# Altium PCB StepperMotorAuxBoard.PcbDoc
Units mil, origin at the board's own origin, x right, y up, seen from the top; angles counter-clockwise.
Board outline 2100 x 1500 mil, 2 copper layers (Top Layer, Bottom Layer); 12 components, 16 nets, 51 pads, 0 vias.
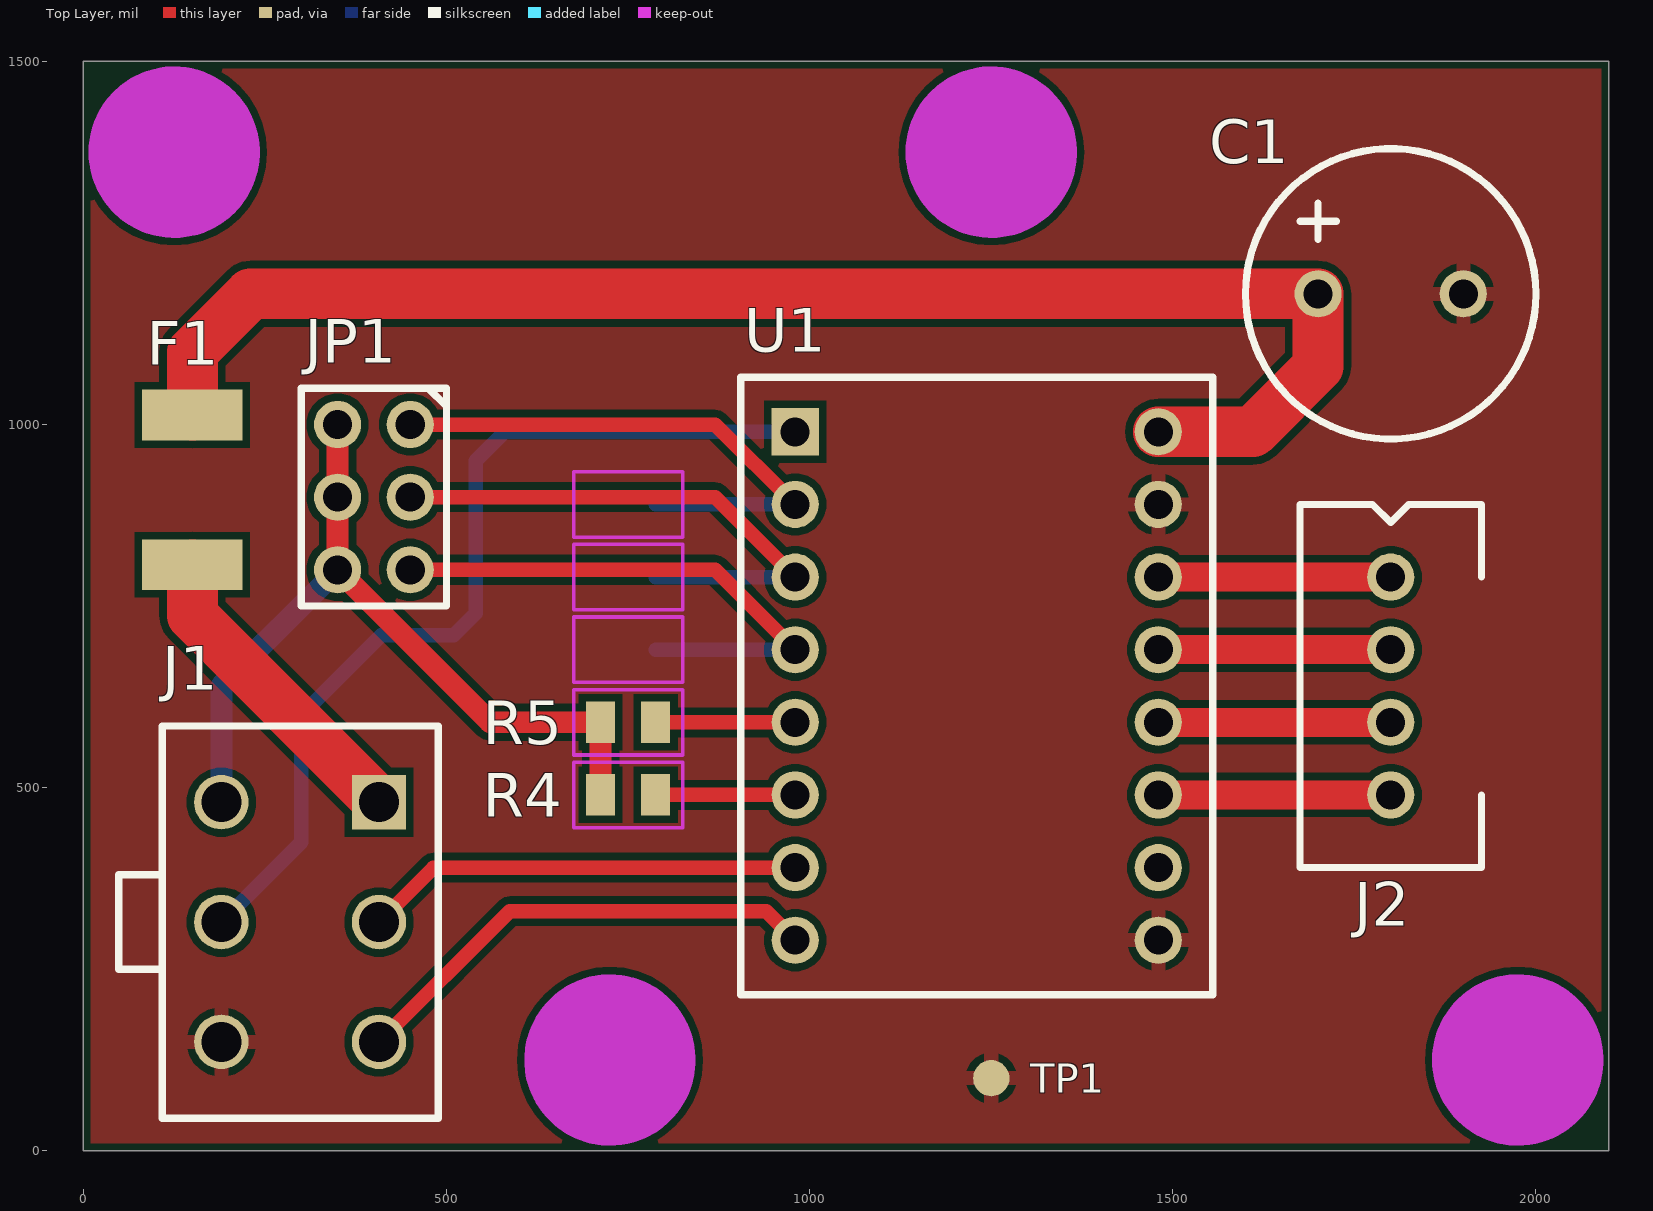
[diagram p0: Top Layer view]
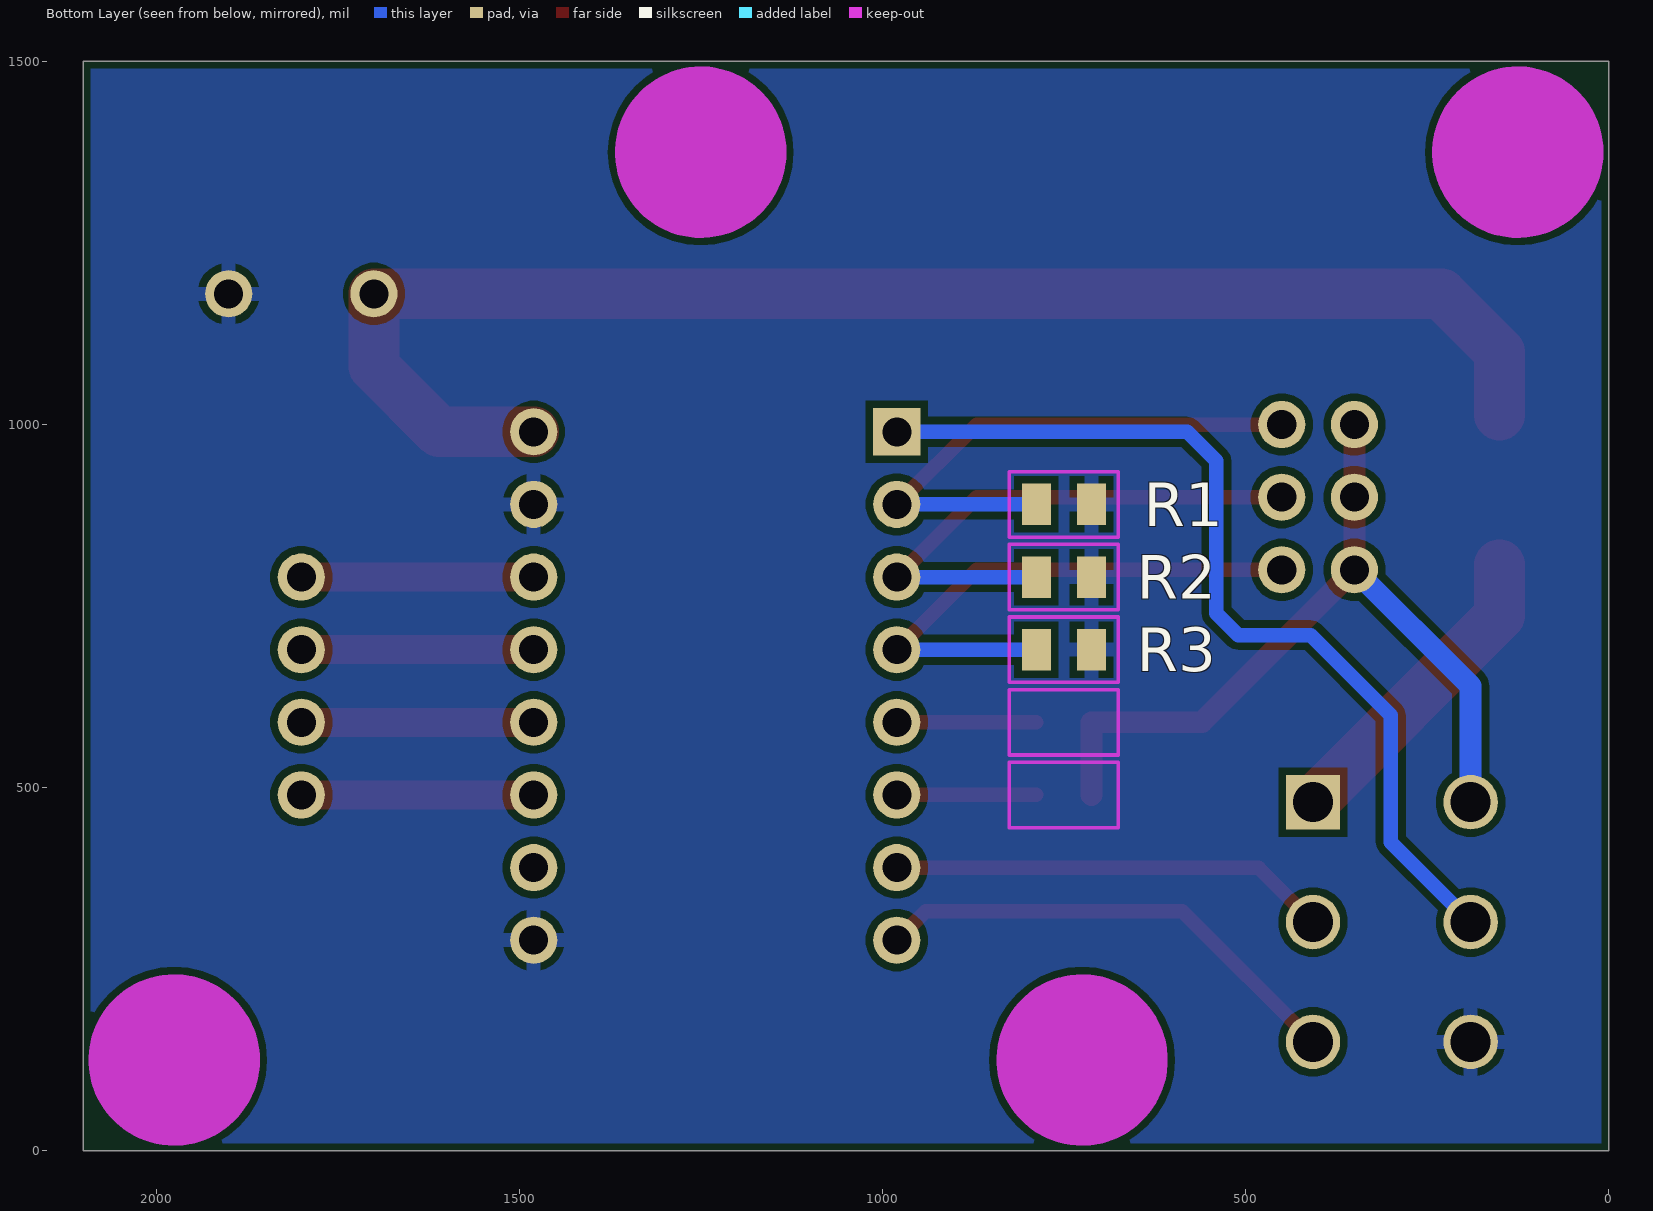
[diagram p1: Bottom Layer view, seen from below]
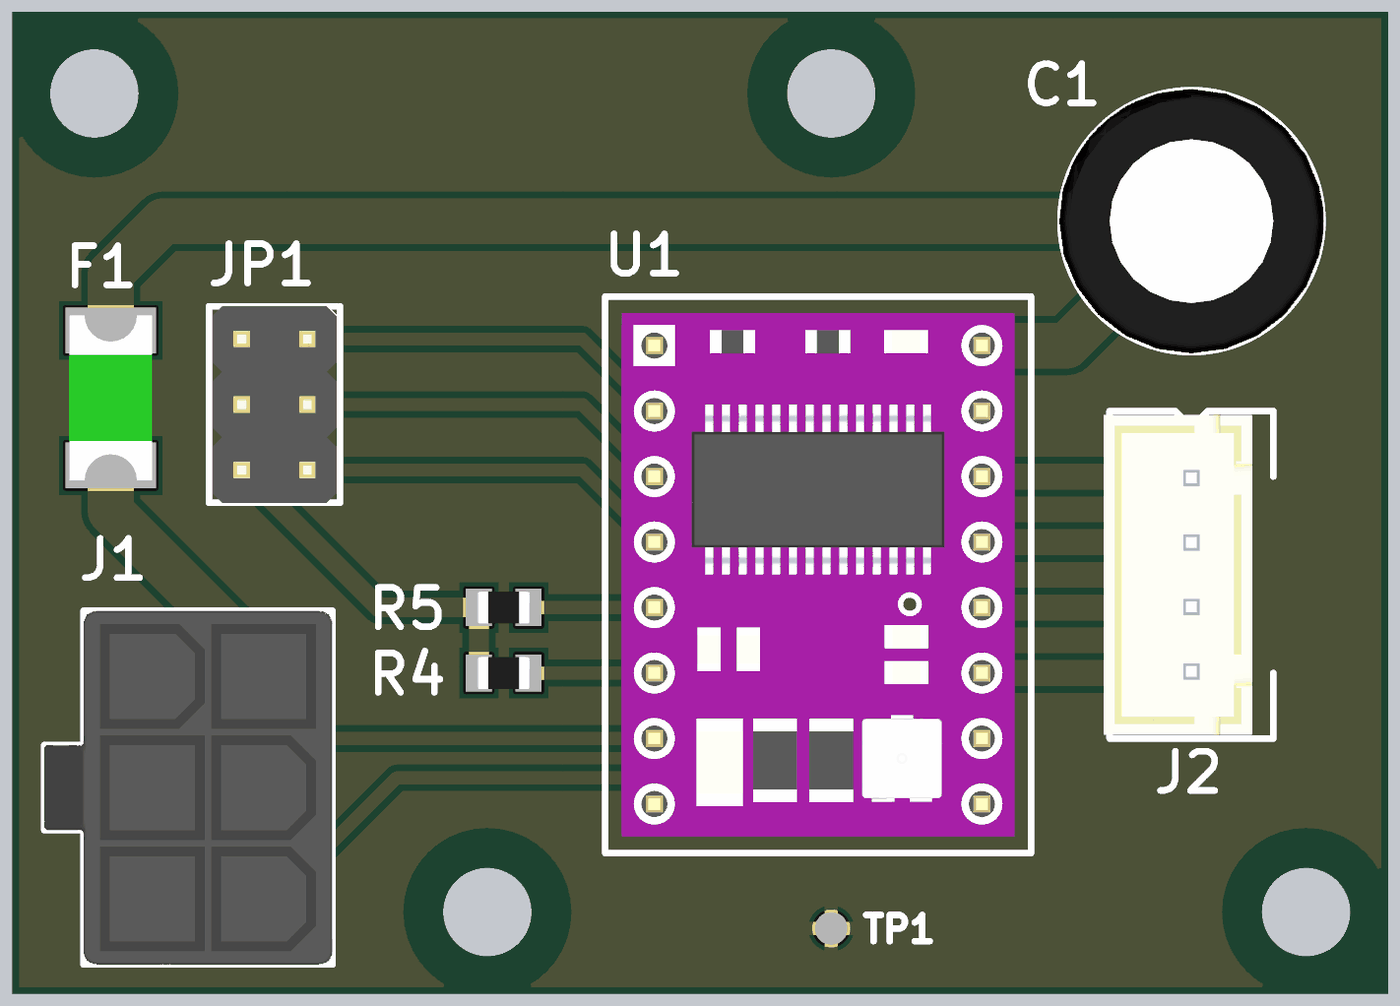
[diagram p2: 3D render of the assembled board from above, using the file's embedded part models]
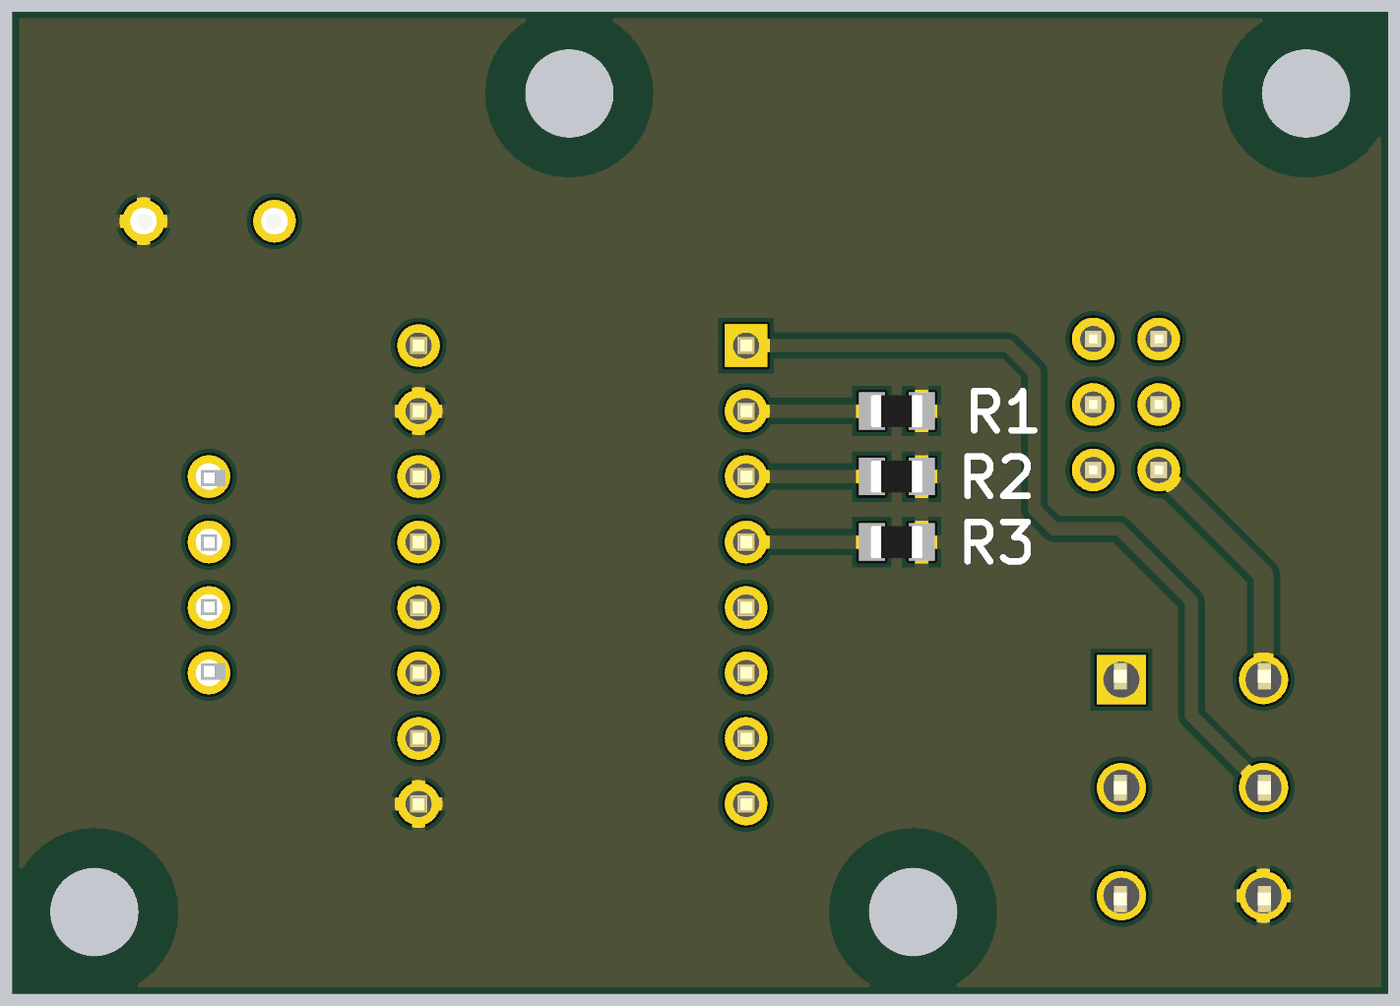
[diagram p3: 3D render of the assembled board from below, using the file's embedded part models]

## Layer stack, top to bottom
Top Solder: solder mask 0.4, Solder Resist, Dk 3.5
Top Layer: signal copper 1.4
Dielectric 1: dielectric 12.6, FR-4, Dk 4.8
Bottom Layer: signal copper 1.4
Bottom Solder: solder mask 0.4, Solder Resist, Dk 3.5

## Board outline
0,0 2100,0 2100,1500 0,1500

## Design rules (kind name [scope] priority, off if disabled: settings)
BoardOutlineClearance [All] p1: gap=10 ignorepadtopadclearanceinfootprint=FALSE except(0: Arc-SplitContinuation Track-SplitContinuation SMDPad-SplitContinuation THPad-SplitContinuation Via-SplitContinuation Fill-SplitContinuation Poly-SplitContinuation Region-SplitContinuation Text-SplitContinuation)
Clearance [All] p1: gap=10 ignorepadtopadclearanceinfootprint=FALSE except(0: Arc-Hole Track-Hole SMDPad-Hole THPad-Hole Via-Hole Fill-Hole Poly-Hole Region-Hole Text-Hole)
HoleSize [All] p1: absolutevalues=TRUE maxlimit=200 minlimit=1 maxpercent=80.000 minpercent=20.000
PolygonConnect [All] p1: connectstyle=Relief reliefconductorwidth=20 reliefentries=4 polygonreliefangle="90 Angle" airgapwidth=10
RoutingVias [All] p1: holewidth=28 width=50 viastyle="Through Hole" minholewidth=28 minwidth=50 maxholewidth=28 maxwidth=50
SolderMaskExpansion [All] p1: expansion=4 istentingtop=FALSE
Width [All] p1: maxlimit=100 minlimit=10 preferedwidth=20 minimp=50.000000 maximp=50.000000 favimp=50.000000
29 further rules are at their usual default settings.

## Components (designator, comment, footprint, x,y, rotation, side; value= is the part's Value field where it differs from the comment)
C1 "100u" Capacitor_UVZ2A101MPD 1800,1180 r0 top
F1 "Fuse" 1812_PTC 150,910 r270 top
J1 "Header_6p_3x2" MOLEX_MiniFitJr_6p 298.5,315 r270 top
J2 "Header_4p" JST-XH_4p 1800,640 r270 top
JP1 "JumperHeader_0.100\"" "JumperHeader_0.100\"" 400,900 r270 top
R1 "100k" 0805 750,890 r0 bottom
R2 "100k" 0805 750,790 r0 bottom
R3 "100k" 0805 750,690 r0 bottom
R4 "1k" 0805 750,490 r180 top
R5 "10k" 0805 750,590 r180 top
TP1 "TestPoint" TestPoint 1230,100 r90 top
U1 "DRV8825" DRV8825 1230,640 r0 top

## Footprints (in the part's own frame and the unit in brackets; to place one, negate y for a bottom-side part, rotate by r counter-clockwise, add the part's x,y. Pads: shape width x height; smd on the part's side, far side on the other; paste and mask are expansions set on the pad)
0805 [mil]
  rect 40x57 smd: 1(-38,0) 2(38,0)
  Keep-Out Layer lines w5: -75,45 75,45 75,-45 -75,-45 -75,45
  body extent -40,-24 40,24, height 20
1812_PTC [mil] "Digikey - 507-1768-1-ND (24V 1.1A Ih)"
  rect 70x138 smd: 1(-103,0) 2(103,0)
  body extent -126,-63 126,63, height 40
Capacitor_UVZ2A101MPD [mil] "Electrolytic capacitor, 100uF, 100V, 5mm, 22mm"
  round 65 hole 40: 1(-100,0) 2(100,0)
  silkscreen extent -200,-200 200,200, body extent -202,-202 202,202, height 871
DRV8825 [mil]
  rect 65x65 hole 40: 1(-250,350)
  round 65 hole 40: 2(-250,250) 3(-250,150) 4(-250,50) 5(-250,-50) 6(-250,-150) 7(-250,-250) 8(-250,-350) 9(250,-350) 10(250,-250) 11(250,-150) 12(250,-50) 13(250,50) 14(250,150) 15(250,250) 16(250,350)
  silkscreen extent -325,-425 325,425, body extent -300,-400 300,400, height 232
JST-XH_4p [mil] "JST-XH 4p 0.098\". Footprint sized to 0.100\""
  round 65 hole 40: 1(-150,0) 2(-50,0) 3(50,0) 4(150,0)
  silkscreen extent -250,-125 250,125, body extent -244,-134 244,93, height 276
"JumperHeader_0.100\"" [mil]
  round 65 hole 40: 1(-100,50) 2(-100,-50) 3(0,50) 4(0,-50) 5(100,50) 6(100,-50)
  silkscreen extent -150,-100 150,100, body extent -150,-95 150,95, height 330
MOLEX_MiniFitJr_6p [mil] "Digikey - WM3845-ND use with WM16239-ND"
  rect 75x75 hole 55: 1(-165,108.5)
  round 75 hole 55: 2(0,108.5) 3(165,108.5) 4(-165,-108.5) 5(0,-108.5) 6(165,-108.5)
  silkscreen extent -270,-250 270,190, body extent -270,-250 270,190, height 500
TestPoint [mil]
  round 50 smd: 1(0,-20)

## Part data
C1: library part "Capacitor Polarized"
R1 R2 R3 R4 R5: library part Resistor
U1: "Stepper motor driver"

## Free pads (board coordinates)
  round 125 hole 135 unplated: MH1(125,1375) MH2(1250,1375) MH3(725,125) MH4(1975,125)

## Nets (pads, with @x,y where several pads share a name; then routed paths per layer and width w, separated by ;. In a path a pad name is that pad's centre, name@x,y a point inside that pad or via, vN(x,y) a via of type N, cw(c..) or ccw(c..) an arc to the next point about the centre after c; other vN are vias at no path point)
+5V: J1.4 JP1.2 JP1.4 JP1.6 R4.2 R5.2 | length 1135.3
  Top Layer w30: JP1.2 JP1.4 JP1.6 560,590 R5.2 R4.2
  Bottom Layer w30: J1.4 190,640 JP1.6
+12V: F1.2 J1.1 | length 433.5
  Top Layer w70: F1.2 150,737 J1.1
A1: J2.3 U1.12 | length 320
  Top Layer w40: U1.12 J2.3
A2: J2.4 U1.11 | length 320
  Top Layer w40: U1.11 J2.4
B1: J2.2 U1.13 | length 320
  Top Layer w40: U1.13 J2.2
B2: J2.1 U1.14 | length 320
  Top Layer w40: U1.14 J2.1
DIR: J1.3 U1.8 | length 664.1
  Top Layer w20: J1.3 587,330 940,330 U1.8
E\N\A\B\L\E\: J1.5 U1.1 | length 1295.1
  Bottom Layer w20: J1.5 300,425 300,600 410,710 510,710 540,740 540,950 580,990 U1.1
GND: C1.2 J1.6 R1.1 R2.1 R3.1 TP1.1 U1.9 U1.15
M0: JP1.1 R1.2 U1.2 | length 767.6
  Top Layer w20: JP1.1 870,1000 U1.2
  Bottom Layer w20: R1.2 U1.2
M1: JP1.3 R2.2 U1.3 | length 767.6
  Top Layer w20: JP1.3 870,900 U1.3
  Bottom Layer w20: R2.2 U1.3
M2: JP1.5 R3.2 U1.4 | length 767.6
  Top Layer w20: JP1.5 870,800 U1.4
  Bottom Layer w20: R3.2 U1.4
NetC1_A: C1.1 F1.1 U1.16 | length 2027.4
  Top Layer w70: F1.1 150,1100 230,1180 C1.1 1700,1080 1610,990 U1.16
R\E\S\E\T\: R5.1 U1.5 | length 192
  Top Layer w20: R5.1 U1.5
S\L\E\E\P\: R4.1 U1.6 | length 192
  Top Layer w20: R4.1 U1.6
STEP: J1.2 U1.7 | length 604.1
  Top Layer w20: J1.2 482,390 U1.7
pads on no net: U1.10

## Polygon pours and split planes (outlines as drawn)
GND on Bottom Layer "GND_Pour" (solid, remove dead copper, pour order 0): 0,0 2100,0 2100,1500 0,1500
GND on Top Layer "GND_L01_P001" (solid, remove dead copper, pour order 1): 0,0 2100,0 2100,1500 0,1500

## Keep-outs
Keep-Out Layer:
  circle w118: c1250,1375 r59
  circle w118: c125,1375 r59
  circle w118: c1975,125 r59
  circle w118: c725,125 r59